# Altium PCB 手动分控1.3F.PcbDoc
Units mil, origin at the board's own origin, x right, y up, seen from the top; angles counter-clockwise.
Board outline 3805.66 x 3362.13 mil, 2 copper layers (Top Layer, Bottom Layer); 104 components, 86 nets, 354 pads, 92 vias.
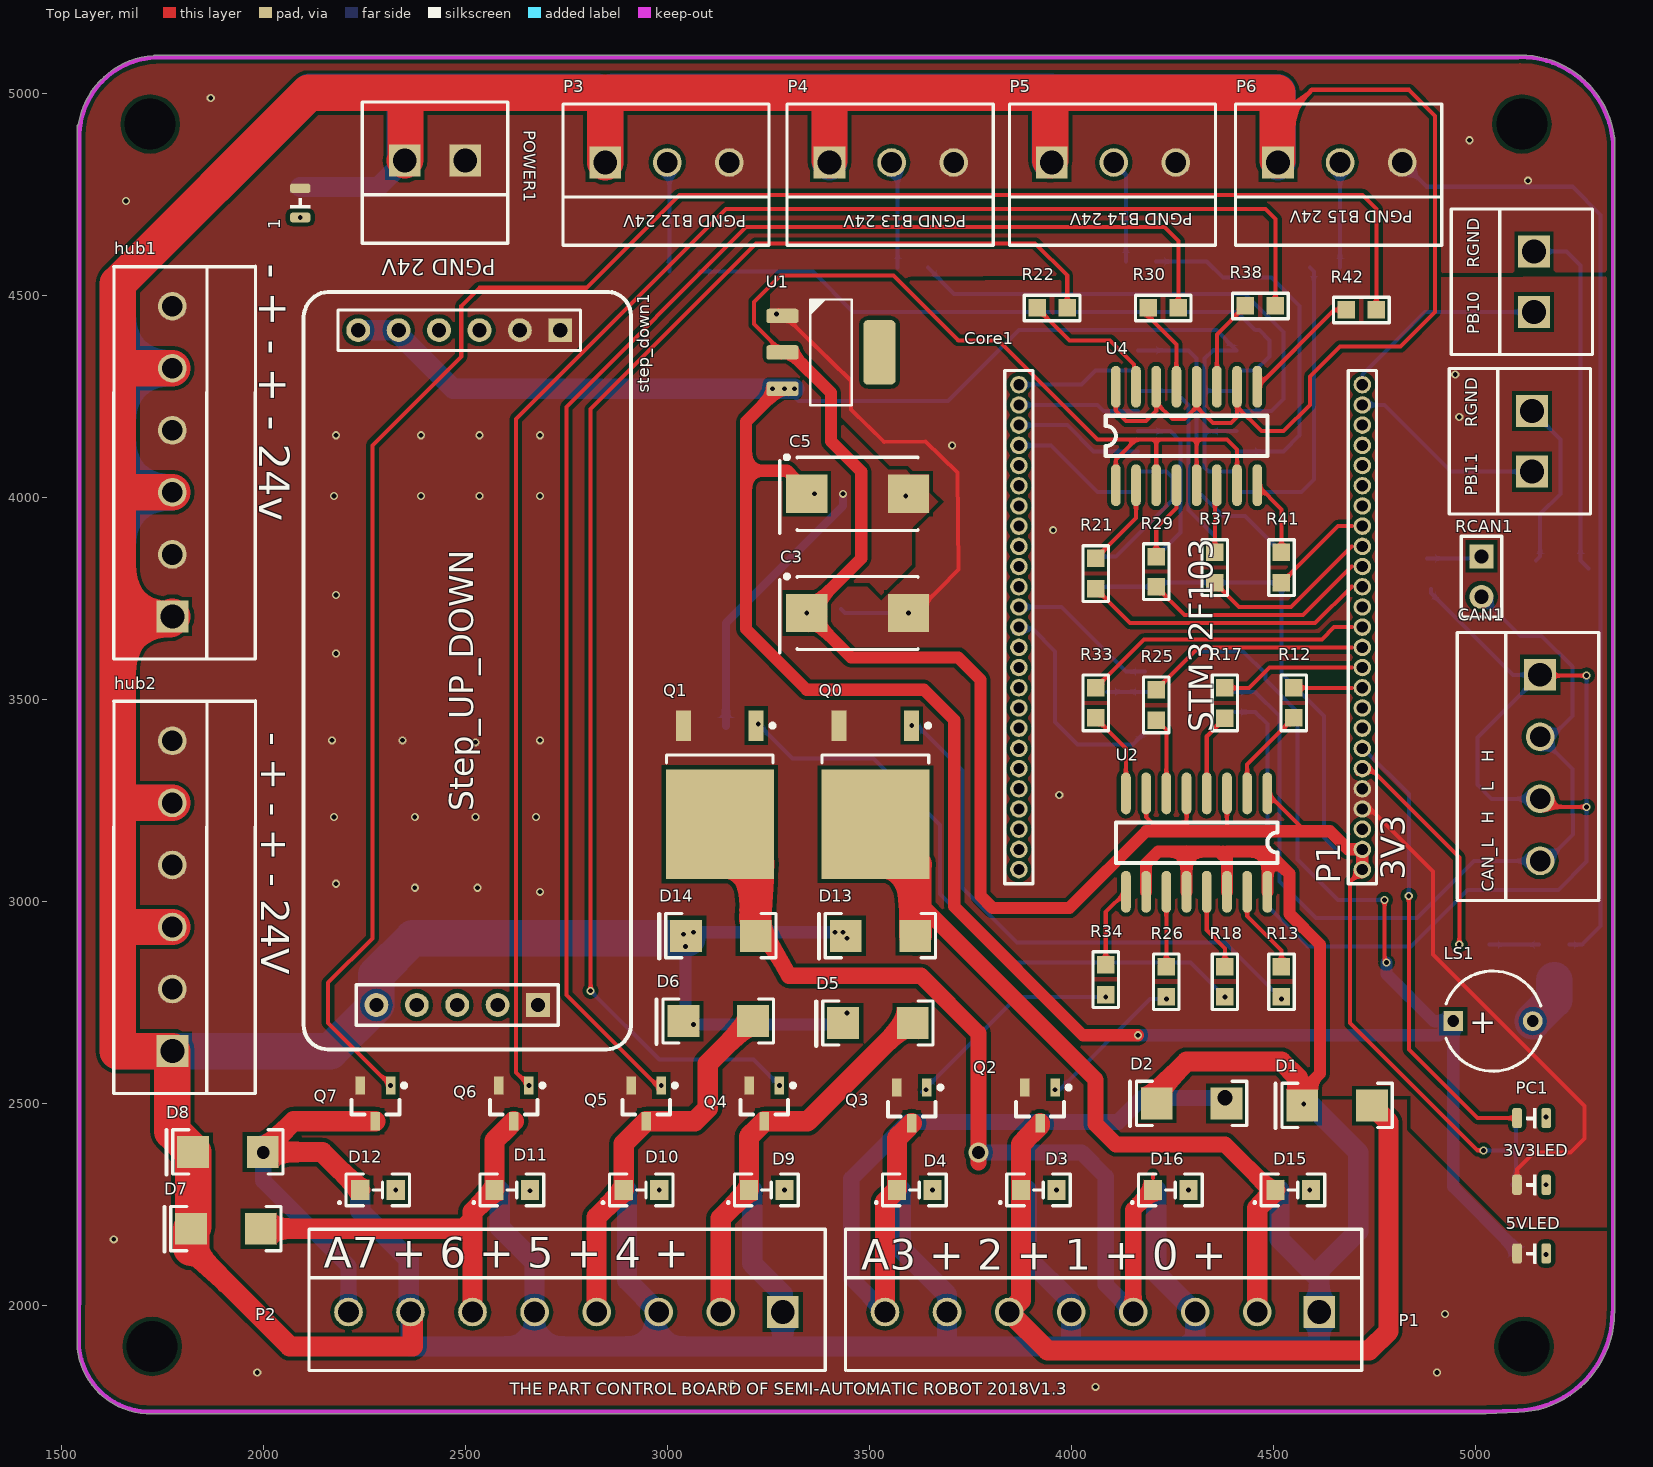
[diagram p0: Top Layer view]
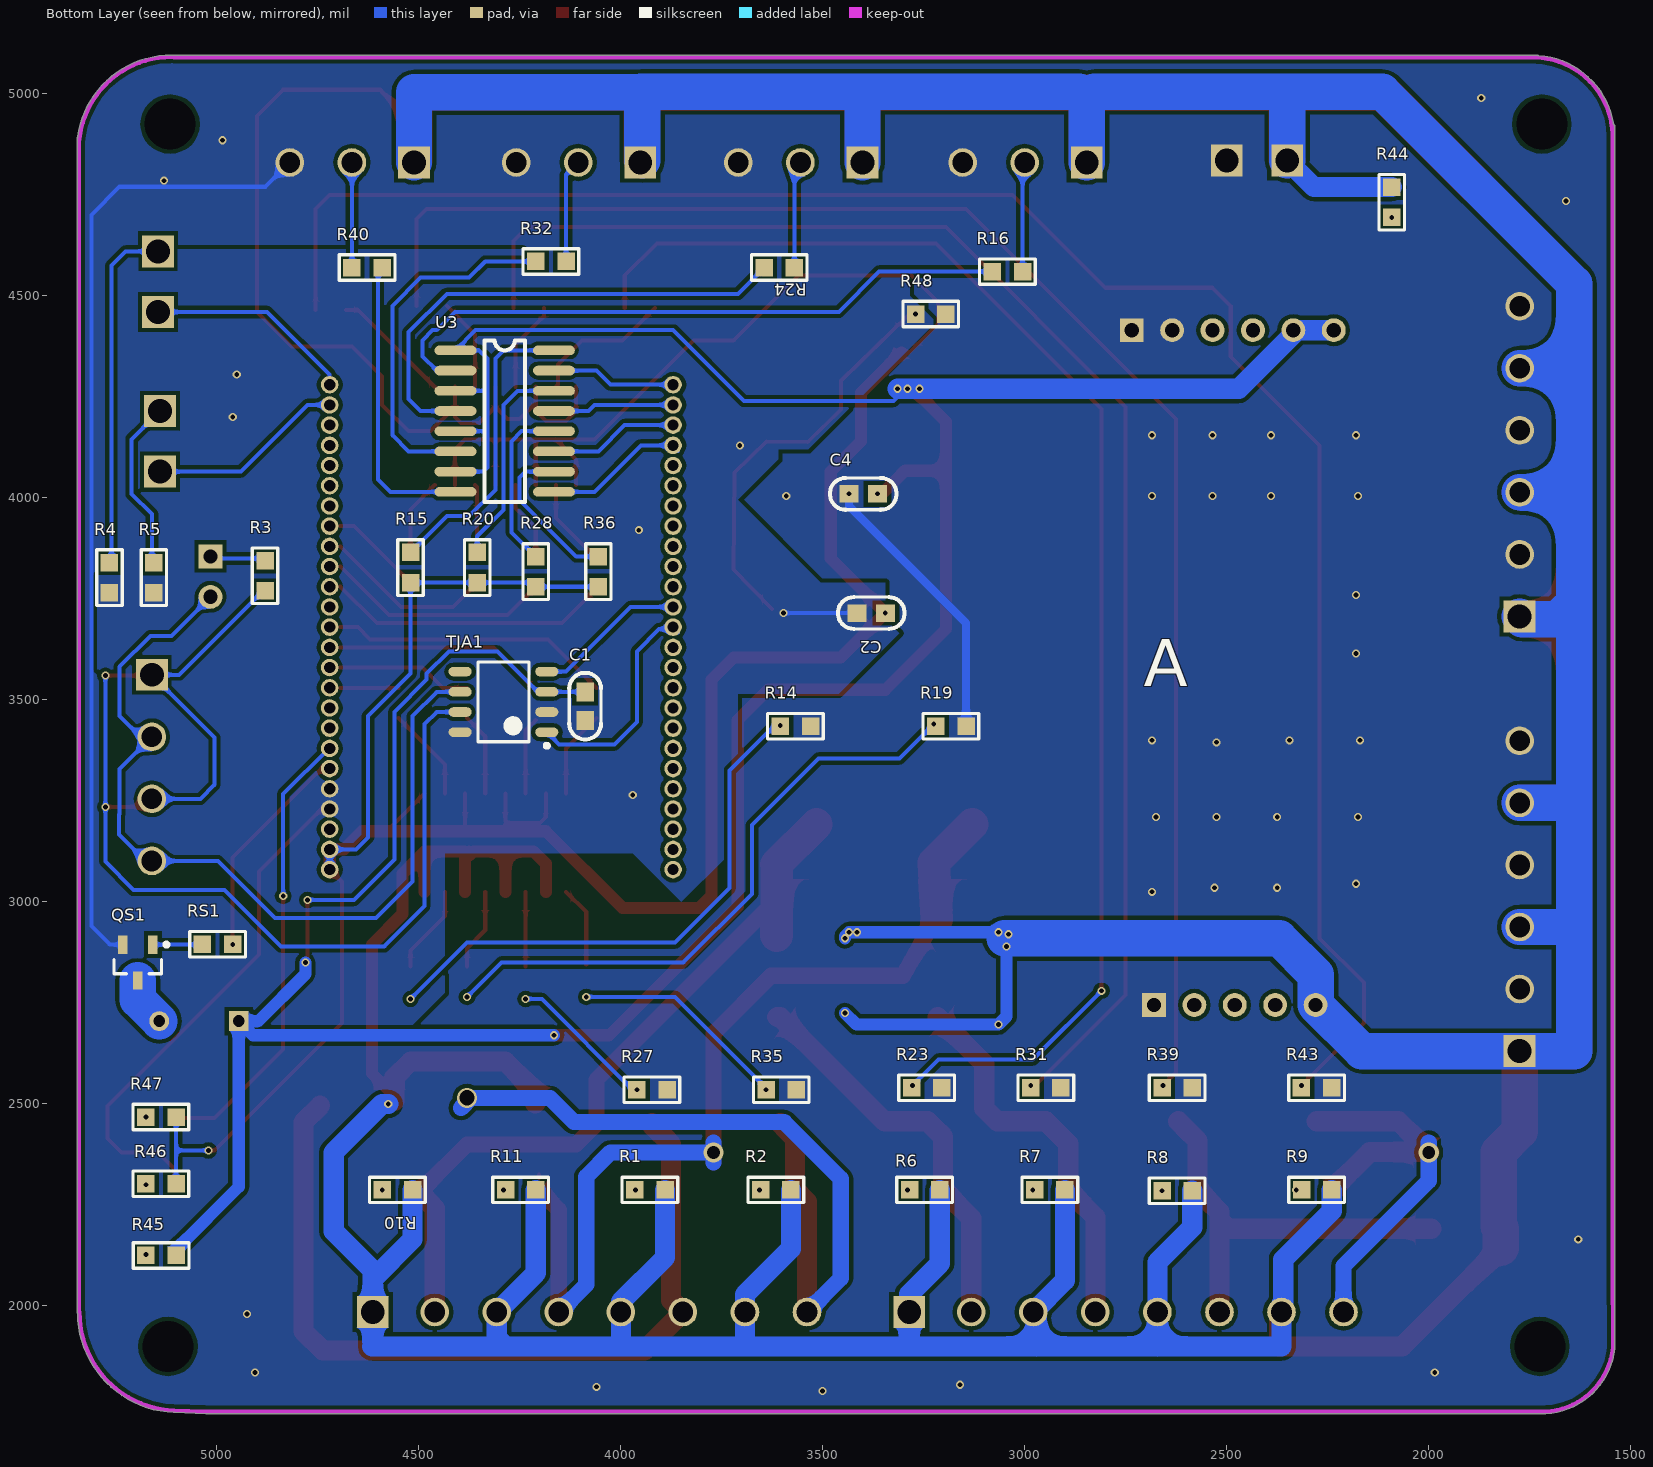
[diagram p1: Bottom Layer view, seen from below]

## Layer stack, top to bottom
Top Solder: solder mask 0.4, Solder Resist, Dk 3.5
Top Layer: signal copper 1.4
Dielectric1: dielectric 12.6, FR-4, Dk 4.8
Bottom Layer: signal copper 1.4
Bottom Solder: solder mask 0.4, Solder Resist, Dk 3.5

## Board outline
1539.39,1894.92 cw(c1544.37,1895.48) 1539.36,1895.48 1539.36,2000.86 cw(c1544.37,2000.86) 1540.19,2003.63 cw(c1544.92,2005.32) 1539.9,2005.32 1539.9,4887.53 cw(c1742.5,4892.5) 1539.9,4897.47 1539.9,4920 cw(c1544.92,4920) 1542.35,4924.3 cw(c1742.5,4892.5) 1728.11,5094.65 cw(c1730,5090) 1730,5095.02 5094.81,5095.02 cw(c5112.5,4862.5) 5343.62,4893.47 cw(c5340,4890) 5345.02,4890 5345.02,1984.66 cw(c5340,1984.66) 5344.11,1981.78 cw(c5095.78,1984.66) 5105.13,1736.49 cw(c5104.94,1741.5) 5105.13,1736.49 5027.19,1733.55 5027.17,1733.55 5027.19,1733.55 cw(c5026.98,1738.56) 5026.98,1733.55 1710.2,1733.55 cw(c1710.2,1738.56) 1709.92,1733.56 cw(c1720,1915)

## Design rules (kind name [scope] priority, off if disabled: settings)
Clearance [All] p1: gap=10 ignorepadtopadclearanceinfootprint=FALSE except(0: Arc-Hole Track-Hole SMDPad-Hole THPad-THPad THPad-Hole Via-Hole Fill-Hole Poly-Hole Region-Hole Text-Hole)
HoleSize [All] p1 off: absolutevalues=TRUE maxlimit=100 minlimit=1 maxpercent=80.000 minpercent=20.000
HoleToHoleClearance [All] p1 off: gap=10 allowstackedmicrovias=TRUE
LayerPairs [All] p1 off: enforce=TRUE
MinimumSolderMaskSliver [All] p1 off: minsoldermaskwidth=10
NetAntennae [All] p1 off: netantennaetolerance=0
PlaneConnect [All] p1: planeconnectstyle=Direct reliefexpansion=20 reliefentries=4 reliefconductorwidth=10 reliefairgap=10
PolygonConnect [All] p1: connectstyle=Direct reliefconductorwidth=10 reliefentries=4 polygonreliefangle="90 Angle" airgapwidth=10
RoutingVias [All] p1: holewidth=12 width=20 viastyle="Through Hole" minholewidth=10 minwidth=20 maxholewidth=28 maxwidth=50
SilkToSilkClearance [All] p1 off: silktosilkclearance=10
SilkToSolderMaskClearance [IsPad] p1 off: minsilkscreentomaskgap=10 clearancetoexposedcopper=TRUE
SolderMaskExpansion [All] p1: expansion=4
Width [All] p1: maxlimit=100 minlimit=10 preferedwidth=10 minimp=50.000000 maximp=50.000000 favimp=50.000000
22 further rules are at their usual default settings.

## Components (designator, comment, footprint, x,y, rotation, side; value= is the part's Value field where it differs from the comment)
1 "LED_0603" LED_0805_GREEN 2091.5,4730 r90 top
3V3LED "LED_0603" LED_0805_GREEN 5139,2300 r180 top (schematic designator 3)
5VLED "LED_0603" LED_0805_GREEN 5139,2130 r180 top (schematic designator 2)
C1 "Cap" CAP-MLCC-0603 4087.72,3520 r270 bottom value=0.1uF
C2 "Cap" CAP-MLCC-0603 3415,3715 r180 bottom value=0.1uF
C3 "Cap_Tan_0805" CAP-TAN-7343/CAPD 3345,3715 r0 top value=100uF
C4 "Cap" CAP-MLCC-0603 3435,4010 r180 bottom value=0.1uF
C5 "Cap_Tan_0805" CAP-TAN-7343/CAPD 3345,4010 r0 top value=100uF
CAN1 "Header 4" Green_4P 5255,3487.09 r270 top
Core1 "STM32F103 SMALL" STM32F103Small 4320,3665 r90 top
D1 "ss34" ss34 4660,2500 r0 top value=1N****
D2 "ss34" ss34 4300,2505 r0 top value=1N****
D3 "(BLUE)" LED-0805 3875.2,2287.24 r0 top value=(Red)
D4 "(BLUE)" LED-0805 3568.2,2287.24 r0 top value=(Red)
D5 "ss34" ss34 3523.6,2704 r0 top value=1N****
D6 "ss34" ss34 3128.6,2709 r0 top value=1N****
D7 "ss34" ss34 1910,2195 r0 top value=1N****
D8 "ss34" ss34 1915,2385 r0 top value=1N****
D9 "(BLUE)" LED-0805 3202,2287.24 r0 top value=(Red)
D10 "(BLUE)" LED-0805 2892,2287.24 r0 top value=(Red)
D11 "(BLUE)" LED-0805 2572,2287.24 r0 top value=(Red)
D12 "(BLUE)" LED-0805 2240,2287.24 r0 top value=(Red)
D13 "ss34" ss34 3530,2920 r0 top value=1N****
D14 "ss34" ss34 3135,2920 r0 top value=1N****
D15 "(BLUE)" LED-0805 4505,2287.24 r0 top value=(Red)
D16 "(BLUE)" LED-0805 4201.8,2287.24 r0 top value=(Red)
hub1 "Header 6" Green_6P 1680,3781.46 r90 top
hub2 "Header 6" Green_6P 1680,2705.83 r90 top
LS1 "Bell" CAP-ELE-PIN200/DIA250 5043.43,2705 r0 top
P1 "Header 8" Green_8P 4538.54,1890 r180 top
P2 "Header 8" Green_8P 3210.63,1890 r180 top
P3 "HDR1x3_2.54" Green_3P 2921.46,4925 r0 top
P4 "HDR1x3_2.54" Green_3P 3476.46,4925 r0 top
P5 "HDR1x3_2.54" Green_3P 4026.46,4925 r0 top
P6 "HDR1x3_2.54" Green_3P 4586.46,4925 r0 top
PB10 "HDR1x2_2.54" Green_2P 5240,4535 r270 top (schematic designator P7)
PB11 "HDR1x2_2.54" Green_2P 5235,4140 r270 top (schematic designator P8)
PC1 "LED_0603" LED_0805_GREEN 5139,2465 r180 top
POWER1 "Header 2" Green_2P 2425,4930 r0 top
Q0 "MOSFET N" LR7843 3515,3265 r270 top
Q1 "MOSFET N" LR7843 3130,3265 r270 top
Q2 "MOSFET N" NMOS_SOT23 3922.4,2496.54 r270 top
Q3 "MOSFET N" NMOS_SOT23 3605,2496.54 r270 top
Q4 "MOSFET N" NMOS_SOT23 3240,2501.54 r270 top
Q5 "MOSFET N" NMOS_SOT23 2947.6,2501.54 r270 top
Q6 "MOSFET N" NMOS_SOT23 2620,2501.54 r270 top
Q7 "MOSFET N" NMOS_SOT23 2277.6,2501.54 r270 top
QS1 "8050" SOT-23B_N 5195,2850 r270 bottom
R1 "22.1kΩ" RES-0603 3964.8,2287.31 r180 bottom value=*kΩ
R2 "22.1kΩ" RES-0603 3578.39,2287.31 r0 bottom value=*kΩ
R3 "Res_0603" RES-0603 4880,3844.8 r270 bottom value=120
R4 "1kΩ" RES-0603 5265,3765.2 r90 bottom value=*kΩ
R5 "1kΩ" RES-0603 5155,3765.2 r90 bottom value=*kΩ
R6 "22.1kΩ" RES-0603 3285,2287.31 r180 bottom value=*kΩ
R7 "22.1kΩ" RES-0603 2900.2,2287.31 r0 bottom value=*kΩ
R8 "22.1kΩ" RES-0603 2660,2285 r180 bottom value=*kΩ
R9 "22.1kΩ" RES-0603 2240,2287.31 r0 bottom value=*kΩ
R10 "22.1kΩ" RES-0603 4589.8,2287.31 r180 bottom value=*kΩ
R11 "22.1kΩ" RES-0603 4210,2287.31 r0 bottom value=*kΩ
R12 "RES" RES-0603 4550,3530 r270 top value=330Ω
R13 "1kΩ" RES-0603 4520,2840 r270 top value=*kΩ
R14 "1kΩ" RES-0603 3530,3435 r0 bottom value=*kΩ
R15 "RES" RES-0603 4520,3865 r270 bottom value=1kΩ
R16 "RES" RES-0603 3005.2,4560 r0 bottom value=1kΩ
R17 "RES" RES-0603 4380,3529.8 r270 top value=330Ω
R18 "1kΩ" RES-0603 4380,2840 r270 top value=*kΩ
R19 "1kΩ" RES-0603 3145,3435 r0 bottom value=*kΩ
R20 "RES" RES-0603 4355,3865 r270 bottom value=1kΩ
R21 "RES" RES-0603 4060,3775.2 r90 top value=330Ω
R22 "2kΩ" RES-0603 3915,4470 r0 top value=*kΩ
R23 "1kΩ" RES-0603 3205.2,2540 r0 bottom value=*kΩ
R24 "RES" RES-0603 3570,4570 r0 bottom value=1kΩ
R25 "330Ω" RES-0603 4210,3525 r270 top value=*kΩ
R26 "2kΩ" RES-0603 4235,2840 r270 top value=*kΩ
R27 "1kΩ" RES-0603 3885,2535 r0 bottom value=*kΩ
R28 "RES" RES-0603 4210,3854.8 r270 bottom value=1kΩ
R29 "RES" RES-0603 4210,3780 r90 top value=330Ω
R30 "2kΩ" RES-0603 4190,4470 r0 top value=*kΩ
R31 "1kΩ" RES-0603 2910.2,2540 r0 bottom value=*kΩ
R32 "1kΩ" RES-0603 4135,4585 r0 bottom value=*kΩ
R33 "330Ω" RES-0603 4060,3530 r270 top value=*kΩ
R34 "2kΩ" RES-0603 4085,2845 r270 top value=*kΩ
R35 "1kΩ" RES-0603 3565,2535 r0 bottom value=*kΩ
R36 "RES" RES-0603 4055,3854.8 r270 bottom value=1kΩ
R37 "330Ω" RES-0603 4355,3790 r90 top value=*kΩ
R38 "2kΩ" RES-0603 4430.2,4475 r0 top value=*kΩ
R39 "1kΩ" RES-0603 2585.2,2540 r0 bottom value=*kΩ
R40 "1kΩ" RES-0603 4664.8,4570 r180 bottom value=*kΩ
R41 "330Ω" RES-0603 4520,3790 r90 top value=*kΩ
R42 "2kΩ" RES-0603 4680.2,4465 r0 top value=*kΩ
R43 "1kΩ" RES-0603 2240.2,2540 r0 bottom value=*kΩ
R44 "Res_0603" RES-0603 2091.5,4694.2 r90 bottom value=10K
R45 "Res_0603" RES-0603 5174.8,2125 r180 bottom value=10K
R46 "Res_0603" RES-0603 5175,2302.69 r180 bottom value=10K
R47 "Res_0603" RES-0603 5175,2467.69 r180 bottom value=10K
R48 "Res1" RES-0603 3270,4455 r180 bottom value=0R
RCAN1 "" HDR1X2 5015,3855 r270 top
RS1 "Res1" RES-0603 5034.8,2895 r180 bottom value=1K
step_down1 "Step_DOWN" Step_Up_Down 2490,3550 r90 top
TJA1 "TJA1050" TJA1050 4290,3495 r0 bottom
U1 "AMS1117" SOT223-3 3405,4360 r270 top
U2 "TLP281-4" SOP16 4485,3256.81 r270 top
U3 "TLP281-4" SOP16 4396.81,4365 r180 bottom
U4 "TLP281-4" SOP16 4110,4043.19 r90 top

## Footprints (in the part's own frame and the unit in brackets; to place one, negate y for a bottom-side part, rotate by r counter-clockwise, add the part's x,y. Pads: shape width x height; smd on the part's side, far side on the other; paste and mask are expansions set on the pad)
CAP-ELE-PIN200/DIA250 [mm] "Capacitor, Electrolytic, Radial; Body 6.3 x 5 mm (Dia.xH typ); Pin Spacing 5 mm (typ)"
  rect 1.25x1.25 hole 0.75: 1(-2.5,0)
  round 1.25 hole 0.75: 2(2.5,0)
  silkscreen extent -2.96,-3.15 3,3.15
CAP-MLCC-0603 [mm]
  rect 1.2x1.1 smd: 1(0,0) 2(1.8,0)
  silkscreen extent -1.2,-1 3,1, body extent 0.02,-0.48 1.78,0.47, height 0.85
CAP-TAN-7343/CAPD [mm]
  rect 2.6x2.4 smd: 1(0,0) 2(6.4,0)
  silkscreen extent -1.7,-2.5 7,2.42
Green_2P [mm]
  rect 2x2 hole 1.5: 1(-1.905,-2.413) 2(1.905,-2.413)
  silkscreen extent -4.57,-7.62 4.57,1.27
Green_3P [mm]
  rect 2x2 hole 1.5: 1(-1.905,-2.413)
  round 1.8 hole 1.3: 2(1.995,-2.413) 3(5.895,-2.413)
  silkscreen extent -4.57,-7.62 8.38,1.27
Green_4P [mm]
  rect 2x2 hole 1.5: 1(-1.905,-2.413)
  round 1.8 hole 1.3: 2(1.995,-2.413) 3(5.895,-2.413) 4(9.795,-2.413)
  silkscreen extent -4.57,-7.62 12.28,1.27
Green_6P [mm]
  rect 2x2 hole 1.5: 1(-1.905,-2.413)
  round 1.8 hole 1.3: 2(1.995,-2.413) 3(5.895,-2.413) 4(9.795,-2.413) 5(13.695,-2.413) 6(17.595,-2.413)
  silkscreen extent -4.57,-7.63 20.12,1.27
Green_8P [mm]
  rect 2x2 hole 1.5: 1(-1.905,-2.413)
  round 1.8 hole 1.3: 2(1.995,-2.413) 3(5.895,-2.413) 4(9.795,-2.413) 5(13.695,-2.413) 6(17.595,-2.413) 7(21.495,-2.413) 8(25.395,-2.413)
  silkscreen extent -4.57,-7.62 27.88,1.27
HDR1X2 [mm] "Connector; Header; 2 Position"
  rect 1.5x1.5 hole 0.9: 1(0,0)
  round 1.5 hole 0.9: 2(2.54,0)
  silkscreen extent -1.27,-1.27 3.81,1.27
LED-0805 [mil]
  rect 45x50 smd: 1(88,0) 2(0,0)
  silkscreen extent -52,-39 122,39
LED_0805_GREEN [mil]
  rrect50% 24x50 smd: 1(-36,0) 2(36,0)
  silkscreen extent -12,-24 12,24, body extent -40,-25 40,25, height 43
LR7843 [mm] "D-PAK, 3-Pads, Body 6.20x6.72mm (max), IPC Medium Density"
  rect 6.9x6.8 smd: D(1.85,0)
  rect 1.9x0.95 smd: G(-4.35,2.28) S(-4.35,-2.28)
  silkscreen extent -4.47,-3.35 -2,3.43, body extent -2.5,-3.35 3.7,3.35, height 2.38
NMOS_SOT23 [mm]
  rect 1.15x0.6 smd: D(1.125,0) G(-1.125,0.95) S(-1.125,-0.95)
  silkscreen extent -1.25,-1.5 0.7,1.93, body extent -0.7,-1.5 0.7,1.5, height 1.14
RES-0603 [mm]
  rect 1.1x1.1 smd: 1(0,0) 2(1.9,0)
  silkscreen extent -0.8,-0.8 2.7,0.8, body extent 0.1,-0.48 1.8,0.47, height 0.6
SOP16 [mil]
  oval 103.62x24 smd: 1(-11.81,0) 2(-11.81,-50) 3(-11.81,-100) 4(-11.81,-150) 5(-11.81,-200) 6(-11.81,-250) 7(-11.81,-300) 8(-11.81,-350) 9(231.81,-350) 10(231.81,-300) 11(231.81,-250) 12(231.81,-200) 13(231.81,-150) 14(231.81,-100) 15(231.81,-50) 16(231.81,0)
  silkscreen extent 60,-375 160,25
SOT223-3 [mil]
  rrect40% 36x80 smd: 1(-90.16,-120) 2(0,-120) 3(90.16,-120)
  rrect30% 160x80 smd: 4(0,120)
  silkscreen extent -131,-51 131,51, body extent -132,-144 132,144, height 71
SOT-23B_N [mm] "SOT23, 3-Leads, Body 2.9x1.3mm, Pitch 0.95mm, Lead Span 2.4mm, IPC Medium Density"
  rect 1.15x0.6 smd: 1(-1.125,0.95) 2(-1.125,-0.95) 3(1.125,0)
  silkscreen extent -1.25,-1.5 0.7,1.92, body extent -0.7,-1.5 0.7,1.5, height 1.14
ss34 [mm]
  rect 2x2 smd: A(2.125,-0.102) K(-2.25,-0.102)
  silkscreen extent -3.94,-1.52 3.4,1.3, body extent -2.48,-1.48 2.37,1.3, height 1.4
Step_Up_Down [mm]
  rect 1.5x1.5 hole 0.9: 1(-20.447,-4.826) 6(21.971,-6.223)
  round 1.5 hole 0.9: 2(-20.447,-2.286) 3(-20.447,0.254) 4(-20.447,2.794) 5(-20.447,5.334) 7(21.971,-3.683) 8(21.971,-1.143) 9(21.971,1.397) 10(21.971,3.937) 11(21.971,6.477)
  silkscreen extent -23.24,-10.67 24.38,9.91
STM32F103Small [mm]
  round 1.1 hole 0.7: 1(-14.859,-10.16) 2(-13.589,-10.16) 3(-12.319,-10.16) 4(-11.049,-10.16) 5(-9.779,-10.16) 6(-8.509,-10.16) 7(-7.239,-10.16) 8(-5.969,-10.16) 9(-4.699,-10.16) 10(-3.429,-10.16) 11(-2.159,-10.16) 12(-0.889,-10.16) 13(0.381,-10.16) 14(1.651,-10.16) 15(2.921,-10.16) 16(4.191,-10.16) 17(5.461,-10.16) 18(6.731,-10.16) 19(8.001,-10.16) 20(9.271,-10.16) 21(10.541,-10.16) 22(11.811,-10.16) 23(13.081,-10.16) 24(14.351,-10.16) 25(15.621,-10.16) 26(-14.859,11.43) 27(-13.589,11.43) 28(-12.319,11.43) 29(-11.049,11.43) 30(-9.779,11.43) 31(-8.509,11.43) 32(-7.239,11.43) 33(-5.969,11.43) 34(-4.699,11.43) 35(-3.429,11.43) 36(-2.159,11.43) 37(-0.889,11.43) 38(0.381,11.43) 39(1.651,11.43) 40(2.921,11.43) 41(4.191,11.43) 42(5.461,11.43) 43(6.731,11.43) 44(8.001,11.43) 45(9.271,11.43) 46(10.541,11.43) 47(11.811,11.43) 48(13.081,11.43) 49(14.351,11.43) 50(15.621,11.43)
  silkscreen extent -15.75,-11.05 16.51,12.32
TJA1050 [mm] "SOIC, 8-Leads, Body 4.90x3.90mm, Pitch 1.27mm, IPC Medium Density"
  oval 1.45x0.6 smd: 1(-2.725,1.905) 2(-2.725,0.635) 3(-2.725,-0.635) 4(-2.725,-1.905) 5(2.725,-1.905) 6(2.725,-0.635) 7(2.725,0.635) 8(2.725,1.905)
  silkscreen extent -2.85,-2.5 1.6,2.88, body extent -2,-2.5 2,2.5, height 1.75

## Part data
1 3V3LED 5VLED PC1: "LED"
C1 C2 C3 C4 C5: "Capacitor"
  C1 C2 C4: LatestRevisionDate=17-Jul-2002, LatestRevisionNote="Re-released for DXP Platform.", PackageReference=RAD-0.3, Published=8-Jun-2000, Publisher="Altium Limited"
CAN1: "Header, 4-Pin", LatestRevisionDate=17-Jul-2002, LatestRevisionNote="Re-released for DXP Platform.", Publisher="Altium Limited"
D1 D2 D5 D6 D7 D8 D13 D14: library part DIODE-Schottky, "肖特基二极管", Code_JEDEC=DO-214-AA, LatestRevisionDate=17-Jul-2002, LatestRevisionNote="Re-released for DXP Platform.", PackageDescription="DO-214-AA/SMB; 2 C-Bend Leads; Body 5.3 x 3.6 mm, inc. leads (LxW)", PackageReference=SMB, Published=8-Jun-2000, Publisher="Altium Limited"
D3 D4 D9 D10 D11 D12 D15 D16: library part LED, "LED", LatestRevisionDate=08-Jul-2005, LatestRevisionNote="Mech Layer 1 removed.", PackageDescription="LED; 2 Leads", PackageReference=LED-1, Published=8-Jun-2000, Publisher="Altium Limited"
hub1 hub2: "Header, 6-Pin", LatestRevisionDate=17-Jul-2002, LatestRevisionNote="Re-released for DXP Platform.", Publisher="Altium Limited"
LS1: "Electrical Bell", LatestRevisionDate=17-Jul-2002, LatestRevisionNote="Re-released for DXP Platform.", PackageReference=PIN2, Published=24-Mar-1999, Publisher="Altium Limited"
P1 P2: "Header, 8-Pin", LatestRevisionDate=17-Jul-2002, LatestRevisionNote="Re-released for DXP Platform.", Publisher="Altium Limited"
P3 P4 P5 P6 PB10 PB11: "Header"
POWER1: "Header, 2-Pin", LatestRevisionDate=17-Jul-2002, LatestRevisionNote="Re-released for DXP Platform.", Publisher="Altium Limited"
Q0 Q1 Q2 Q3 Q4 Q5 Q6 Q7: "IRF530"
QS1: library part QNPN, "NPN Bipolar Transistor", LatestRevisionDate=29-May-2009, LatestRevisionNote="IPC-7351 Footprint Added.", PackageDescription="3-Pin SOT-23 Package 0.95 mm Pitch, 2.4 mm Lead Span", PackageReference=SOT-23B, PackageVersion=Aug-1999, Published=8-Jun-2000, Publisher="Altium Limited"
R1 R2 R4 R5 R6 R7 R8 R9 R10 R11 R13 R14 R18 R19 R22 R23 R25 R26 R27 R30 R31 R32 R33 R34 R35 R37 R38 R39 R40 R41 R42 R43: library part RES, "电阻", LatestRevisionDate=17-Jul-2002, LatestRevisionNote="Re-released for DXP Platform.", PackageDescription="Axial Device, Thru-Hole; 2 Leads; 0.3 in Pin Spacing", PackageReference=AXIAL-0.3, Published=8-Jun-2000, Publisher="Altium Limited"
R3 R44 R45 R46 R47 R48 RS1: "Resistor"
  R48 RS1: LatestRevisionDate=17-Jul-2002, LatestRevisionNote="Re-released for DXP Platform.", PackageReference=AXIAL-0.3, Published=8-Jun-2000, Publisher="Altium Limited"
R12 R15 R16 R17 R20 R21 R24 R28 R29 R36: "电阻", LatestRevisionDate=17-Jul-2002, LatestRevisionNote="Re-released for DXP Platform.", PackageDescription="Axial Device, Thru-Hole; 2 Leads; 0.3 in Pin Spacing", PackageReference=AXIAL-0.3, Published=8-Jun-2000, Publisher="Altium Limited"
RCAN1: library part "Header 2", "Header, 2-Pin", LatestRevisionDate=17-Jul-2002, LatestRevisionNote="Re-released for DXP Platform.", Publisher="Altium Limited"
TJA1: "CAN总线收发器"
U1: library part AMS１１１７
U2 U3 U4: library part IC-TLP521-4, "TLP521-4,TLP281-4"

## Free pads (board coordinates)
  round 0 hole 125.98: 34(1720,4925) 35(5115,4925) 36(5120,1900) 37(1725,1900)

## Via types
v1: diameter 20, hole 12, Top Layer to Bottom Layer, 89 vias
v2: diameter 50, hole 32, Top Layer to Bottom Layer, 2 vias
v3: diameter 50, hole 38, Top Layer to Bottom Layer, 1 vias

## Nets (pads, with @x,y where several pads share a name; then routed paths per layer and width w, separated by ;. In a path a pad name is that pad's centre, name@x,y a point inside that pad or via, vN(x,y) a via of type N, cw(c..) or ccw(c..) an arc to the next point about the centre after c; other vN are vias at no path point)
3V3: C2.2 C3.1 Core1.1 Core1.2 R15.2 R20.2 R28.2 R36.2 R46.2 R47.2 U1.2 U2.1 U2.3 U2.5 U2.7 U4.1 U4.3 U4.5 U4.7 | length 7829.9
  Top Layer w10: U1.2@3305,4360 U1.2 3215,4430 3215,4485 3280,4550 3560,4550 3720,4390 3820,4390 4065,4145 4160,4145 ; U4.1 4110,4095 4160,4145 ; U2.7 4185,3210 4200,3195 4280,3195 ; U4.3 4210,4145 ; U2.5 4285,3200 4280,3195 ; 4295,3180 4280,3195 ; U4.5 4310,4145 ; U2.3 4385,3190 4395,3180 ; U4.7 4410,4120 4385,4145 4310,4145 ; U2.1 4573.62,3180 ; Core1.2@4705,3130 Core1.2 ; Core1.1 4690,3050 4690,2700 5005,2385 v1@5015,2385 ; 4160,4145 4210,4145 ; 4210,4145 4310,4145
  Top Layer w30: U1.2@3305,4360 3405,4260 3405,4140 3480,4065 3480,3850 v1(3345,3715) 3455,3605 3720,3605 3775,3550 3775,3015 3805,2985 3995,2985 4185,3175 4640,3175 4685,3130 Core1.2@4705,3130 ; Core1.1 Core1.2
  Bottom Layer w10: R36.2 R28.2 4220.2,3790.2 R20.2 R15.2 4520,3565 4625,3460 4625,3160 4655,3130 Core1.2 Core1.1 ; v1(5020,2385) 5100.2,2385 ; R46.2@5090,2300 R46.2@5103,2300 ; R46.2@5092.31,2297.69 R46.2@5105.2,2297.69 ; R46.2 5100.2,2385 ; R47.2 5100.2,2385
5V: C1.1 C4.2 C5.1 LS1.1 R45.2 step_down1.10 step_down1.11 TJA1.3 U1.3 U3.1 U3.3 U3.5 U3.7 | length 8444.1
  Top Layer w10: v1(4775,3005) 4775,2855 v1(4780,2850)
  Top Layer w30: U1.3@3268.04,4261.96 3195,4188.91 3195,4067.11 ; C5.1@3353.03,4010 3295.92,4067.11 3195,4067.11 ; v1(4165,2670) 4028.43,2670 3710,2988.43 3710,3450 3635,3525 3345,3525 3195,3675 3195,4067.11
  Bottom Layer w10: 3300,4265 3325,4240 3695,4240 3870,4415 4358.62,4415 U3.1 4350,4365 4330,4345 4330,4265 ; C1.1 TJA1.3 4205,3520 4305,3620 4425,3620 4480,3565 4480,3550 4560,3470 4560,3105 4660,3005 v1@4770,3005 ; U3.7 4340,4065 4330,4075 4330,4165 ; U3.5 4345,4165 4330,4165 ; U3.3 4330,4265 ; 4330,4165 4330,4265
  Bottom Layer w30: step_down1.10@2335,4405 step_down1.10 ; v1(4165,2670) 4910,2670 LS1.1 ; v1(4780,2850) 4780,2821.57 4896.57,2705 LS1.1 ; R45.2@5095,2135 R45.2@5095,2145 ; R45.2@5100,2140 R45.2@5095,2145 ; LS1.1 4945,2295 R45.2@5095,2145
  Bottom Layer w50: step_down1.11 step_down1.10 ; step_down1.10@2335,4405 2470,4270 v1(3260,4270) v1(3290,4270) v1(3315,4270)
  other v1: 3364.13,4010
24V: D1.K D2.K D5.K D6.K D7.K D8.K D13.K D14.K hub1.1 hub1.3 hub1.5 hub2.1 hub2.3 hub2.5 P1.1 P1.3 P1.5 P1.7 P2.1 P2.3 P2.5 P2.7 P3.1 P4.1 P5.1 P6.1 POWER1.1 R1.2 R2.1 R6.2 R7.1 R8.2 R9.1 R10.2 R11.1 R44.2 step_down1.5 U2.10 U2.12 U2.14 U2.16 U4.10 U4.12 U4.14 U4.16 | length 27560.6
  Top Layer w10: U4.16 4110,4215 4135,4190 4185,4190 4210,4215 U4.14@4210,4235 ; U4.14 U4.14@4210,4235 ; U4.12 U4.12@4310,4225 ; U4.10 U4.10@4410,4225 ; 4510,4925 4595,5010 4835,5010 4900,4945 4900,4460 4815,4375 4665,4375 4590,4300 4590,4230 4525,4165 4470,4165 U4.10@4410,4225 ; U4.14@4210,4235 4250,4195 4280,4195 U4.12@4310,4225 ; U4.12@4310,4225 4350,4185 4395,4185 4410,4200 U4.10@4410,4225
  Top Layer w30: U2.10 4185,3095 4215,3125 4285,3125 ; U2.12 4285,3125 ; 4375,3125 4385,3115 ; U2.14 4385,3115 ; U2.16 4485,3125 ; D1.K@4570,2530 4615,2575 4615,2895 4540,2970 4540,3070 4485,3125 ; 4285,3125 4365,3125 4375,3115 4385,3115 ; 4385,3115 4385,3125 4485,3125
  Top Layer w50: 1821.4,2143.6 2065,1900 2370,1900 2370,1979.37 P2.7 ; D2.K 4211.4,2531.4 4285,2605 4520,2605 4560,2565 D1.K@4560,2507.4
  Top Layer w90: hub2.3 1647.09,2937.91 1640,2945 ; hub2.5 1655,3245 1640,3260 ; hub1.1 1768.54,3700 1640,3700 ; hub1.3 1643.54,4013.54 1640,4010 ; hub1.5 1640.63,4320.63 1640,4320 ; 1821.4,2143.6 D7.K 1826.4,2196 D8.K 1775,2432.4 hub2.1 1640.83,2630.83 1640,2630 1640,2945 ; POWER1.1 2352.09,4837.09 2352.09,5002.91 ; P3.1 2846.46,4996.46 2840,5002.91 ; P4.1@3401.46,4835 3401.46,5002.91 ; P5.1@3947.91,4835 3947.91,5002.91 ; P6.1@4510,4835 4510,4925 4510,5002.91 3947.91,5002.91 ; 1640,2945 1640,3260 ; 1640,3260 1640,3700 ; 1640,3700 1640,4010 ; 1640,4010 1640,4320 ; 1640,4320 1640,4530 2112.91,5002.91 2352.09,5002.91 ; 2352.09,5002.91 2840,5002.91 ; 2840,5002.91 3398.54,5002.91 3400,5001.46 3401.46,5002.91 ; 3401.46,5002.91 3947.91,5002.91
  Bottom Layer w30: 3045,2910 v1(3045,2890) 3045,2716.4 v1(3065,2696.4) 3416.4,2696.4 v1(3445,2725) ; v1(3065,2925) 3070,2925 3075,2930 ; 3075,2925 v1(3415,2925) v1(3435,2925) 3445,2915 v1(3445,2910)
  Bottom Layer w50: R44.2 2284,4769 POWER1.1 ; R9.1 2240,2235 2360,2115 2360,2010 2364.37,2005.63 P2.7 2364.37,1899.53 2671.46,1899.53 ; R8.2 2585.2,2194.8 2671.46,2108.54 P2.5 2671.46,1899.53 ; R7.1 2900.2,2063.35 P2.3 2970.47,1976.92 2970.47,1899.53 ; R6.2 3210.2,2104.8 3285.63,2029.37 P2.1 3285.63,1909.7 3275.47,1899.53 ; R2.1 3578.39,2141.61 3692.28,2027.72 P1.7 3692.28,1902.28 3689.53,1899.53 ; R1.2 3890,2120 3999.37,2010.63 P1.5 3999.37,1908.44 3990.47,1899.53 ; R11.1 4210,2081.46 P1.3 4306.46,1921.46 4284.53,1899.53 ; R10.2 4515,2165 4613.54,2066.46 ; v1(4575,2500) 4590,2500 4710,2380 4710,2185 4613.54,2088.54 4613.54,2066.46 ; 2671.46,1899.53 2970.47,1899.53 ; 2970.47,1899.53 3275.47,1899.53 ; 3275.47,1899.53 3689.53,1899.53 ; 3689.53,1899.53 3990.47,1899.53 ; 3990.47,1899.53 4284.53,1899.53 ; 4284.53,1899.53 4614.53,1899.53 4613.54,1900.53 P1.1 4613.54,2066.46
  Bottom Layer w90: 1645,3245 hub2.5 ; 1645,3725 1655,3725 1680,3700 1768.54,3700 hub1.1 ; hub2.3 1647.09,2937.91 1640,2945 ; hub1.3 1640,4013.54 ; hub1.5 1640,4320.63 ; POWER1.1 2350,5000 ; P3.1 2846.46,4986.46 ; 3050,2910 3045,2910 2370,2910 2280,2820 step_down1.5 2165.83,2630.83 hub2.1 1640,2630.83 1640,2945 ; P4.1 3401.46,5000 ; P5.1@3946.46,4835 3946.46,4998.54 3947.91,5000 ; P6.1 4511.46,5003.54 3951.46,5003.54 3950,5005 2865,5005 2846.46,4986.46 ; 1640,2945 1640,4013.54 ; 1640,4013.54 1640,4320.63 ; 1640,4320.63 1640,4530 2115,5005 2827.91,5005 2846.46,4986.46
  other v1: 3040,2920
A0: Q0.G R13.2 R14.2 | length 1365.2
  Bottom Layer w10: v1(3604.76,3436.26) 3618.74,3436.26 3730,3325 3730,3035 3865,2900 4380,2900 v1(4520,2760)
A0_OUT-: D13.A D15.2 P1.2 Q0.D | length 1935.3
  Top Layer w40: 3615,3005 4060,2560 4060,2450 4110,2400 4380,2400 4492.76,2287.24 D15.2
  Top Layer w50: P1.2 4460,2242.24 D15.2
  Top Layer w80: Q0.D 3615,3092.17 3613.65,3090.81 D13.A 3615,2917.35 3615,2960
A1: Q1.G R18.2 R19.2 | length 1551.1
  Bottom Layer w10: R19.2@3219.76,3425.24 3225,3430.47 v1(3225,3440) 3310,3355 3510,3355 3675,3190 3675,3020 3845,2850 4295,2850 v1(4380,2765)
A1_OUT-: D14.A D16.2 P1.4 Q1.D | length 2374.9
  Top Layer w10: 3217.55,2957.45 3237.57,2929.61 D14.A@3238.83,2927.38 ; D16.2@4201.8,2272.37 D16.2@4201.8,2277.37 ; 4201.8,2316.8 4201.8,2325.61
  Top Layer w40: D14.A@3238.83,2927.38 3300.99,2817.1 3627.9,2817.1 3770,2675 v2(3770,2380) 3770,2355 ; P1.4 4152.91,2238.36 D16.2
  Top Layer w80: Q1.D 3225,3097.17 3217.55,2957.45
  Bottom Layer w40: 3770,2355 v2(3770,2380) ; 3770,2405 v2(3770,2380) ; P1.4 4085,2052.91 4085,2320 4025,2380 v2(3770,2380)
A2: Q2.G R26.2 R27.2 | length 371.9
  Bottom Layer w10: v1(3959.8,2535) 3970,2535 4195,2760 v1(4235,2760) v1@4237.5,2757.5
A2_OUT-: D1.A D3.2 P1.6 Q2.D | length 2072.7
  Top Layer w50: Q2.D 3922.4,2447.4 3875.2,2400.2 D3.2 3875.2,2014.37 P1.6 3940.83,1890 4737.29,1890 4785,1937.71 4785,2454.65 D1.A
A3: Q3.G R34.2 R35.2 | length 552.3
  Bottom Layer w10: R35.2@3630,2530 3865,2765 v1(4085,2765)
  other v1: 3639.8,2535
A3_OUT-: D2.A D4.2 P1.8 Q3.D | length 1893.2
  Top Layer w50: P1.8 3538.74,2257.79 D4.2 3568.2,2415.44 Q3.D
  Bottom Layer w40: P1.8 3455,2068.74 3455,2315 3595,2455 4115,2455 4175,2515 4370,2515 4395,2490 4395,2489.65 4395.18,2489.82
  other v3: 4380,2515
A4: Q4.G R22.2 R23.2 | length 3467.3
  Top Layer w10: v1(2810,2780) 2810,4220 3220,4630 3910,4630 3989.8,4550.2 R22.2
  Bottom Layer w10: v1(2810,2780) 2980,2610 3213.23,2610 v1(3277.4,2545.83)
A4_OUT-: D5.A D9.2 P2.2 Q4.D | length 996
  Top Layer w50: P2.2 3132.09,2217.33 D9.2 3202,2419.24 Q4.D 3347.24,2457.24 3605,2715 D5.A@3612.24,2715
A5: Q5.G R30.2 R31.2 | length 3661.6
  Top Layer w10: v1(2985,2545.83) 2974.17,2545.83 2750,2770 2750,4225 3195,4670 4230,4670 4264.8,4635.2 R30.2
A5_OUT-: D6.A D10.2 P2.4 Q5.D | length 961.9
  Top Layer w50: P2.4 2825,2220.24 D10.2 2892,2401.65 Q5.D 3067.76,2457.24 3100,2489.49 3100,2600 D6.A@3215,2715
A6: Q6.G R38.2 R39.2 | length 3983.3
  Top Layer w10: v1(2657.4,2545.83) 2625,2578.23 2625,4195 3145,4715 4480,4715 4505,4690 R38.2
A6_OUT-: D7.A D11.2 P2.6 Q6.D | length 1047.9
  Top Layer w50: D7.A 2496,2191 2517.91,2212.91 ; P2.6 2517.91,2212.91 ; Q6.D 2572,2409.24 D11.2 2517.91,2233.16 2517.91,2212.91
A7: Q7.G R42.2 R43.2 | length 4773.5
  Top Layer w10: v1(2315,2545.83) 2160,2700.83 2160,2800 2270,2910 2270,4130 2490,4350 2490,4475 2535,4520 2800,4520 3030,4750 4720,4750 4755,4715 R42.2
A7_OUT-: D8.A D12.2 P2.8 Q7.D | length 1093.1
  Top Layer w50: D12.2 2146.24,2381 D8.A 2074.89,2457.24 Q7.D
  Bottom Layer w40: 2000,2405 v2(2000,2380) 2000,2310 2210.83,2099.17 P2.8@2210.83,1990
B12: P3.2 R16.1 | length 272.2
  Bottom Layer w10: P3.2 3005.2,4824.8 R16.1
B13: P4.2 R24.1 | length 266.2
  Bottom Layer w10: P4.2 3570,4815 R24.1
B14: P5.2 R32.1 | length 257.4
  Bottom Layer w10: P5.2 4135,4800 R32.1
B15: P6.2 R40.1 | length 260.1
  Bottom Layer w10: R40.1 4664.8,4829.8 P6.2
CAN_H: CAN1.1 CAN1.3 R3.2 TJA1.7 | length 3032.2
  Top Layer w10: CAN1.3 5180,3235 v1(5275,3235) ; CAN1.1 5162.91,3565 5167.91,3560 v1(5275,3560)
  Bottom Layer w10: TJA1.7@4405,3470 4455,3470 4485,3440 4485,2990 4585,2890 4840,2890 4980,3030 5205,3030 5275,3100 v1(5275,3235) v1(5275,3560) ; R3.2@4890,3775 4890,3765 5092.91,3562.09 CAN1.1 5005,3407.09 5005,3290 5040,3255 CAN1.3
CAN_L: CAN1.2 CAN1.4 RCAN1.2 TJA1.6 | length 2211.8
  Bottom Layer w10: TJA1.6 4455,3520 4515,3460 4515,3050 4605,2960 4855,2960 4996.46,3101.46 CAN1.4 5176.46,3101.46 5241.46,3166.46 5241.46,3216.1 5240,3217.56 5240,3328.54 CAN1.2 5188.54,3408.54 5240,3460 5240,3582.04 5163.52,3658.52 5111.48,3658.52 RCAN1.2 RCAN1.2@5005,3765
CAN_RX: Core1.39 TJA1.4 | length 379
  Bottom Layer w10: Core1.39 3975,3730 4135,3570 TJA1.4
CAN_TX: Core1.38 TJA1.1 | length 559
  Bottom Layer w10: Core1.38@3858.35,3666.65 Core1.38@3881.65,3666.65 ; Core1.38@3880,3675 3905,3675 3960,3620 3960,3445 4015,3390 4152.72,3390 TJA1.1
GND: 3V3LED.2 C1.2 C2.1 C3.2 Core1.4 Core1.5 R4.1 R5.1 R48.1 TJA1.2 TJA1.8 U1.1 | length 2487.8
  Top Layer w10: U1.1@3275,4465.16 3277.53,4462.69 3285.1,4455.26 3287.6,4452.82 3454,4289.89 3454.75,4218.58 3536.86,4138.18 3639.27,4139.26 3717.71,4062.45 3720.24,3822.27 C3.2@3625,3725 ; Core1.4 4740,3230 4895,3075 4895,2870 5270,2495 5270,2415 5235,2380 5145,2380 5103,2338 3V3LED.2
  Bottom Layer w10: C2.1@3430,3725 3440,3715 v1(3596.97,3715)
  other v1: 3970,3265 3955,3920 3705,4130 4960,4200 4950,4305 3270,4455
Net1_1: 1.1 R44.1
  other v1: 2091.5,4694.2
Net2_1: 5VLED.1 R45.1
  other v1: 5175,2127.69
Net3_1: 3V3LED.1 R46.1
  other v1: 5175,2300
NetD3_1: D3.1 R1.1
  other v1: 3963.2,2287.24
NetD4_1: D4.1 R2.2
  other v1: 3656.2,2287.24
NetD9_1: D9.1 R6.1
  other v1: 3290,2287.24
NetD10_1: D10.1 R7.2
  other v1: 2980,2287.24
NetD11_1: D11.1 R8.1
  other v1: 2660,2285
NetD12_1: D12.1 R9.2
  other v1: 2328,2287.24
NetD15_1: D15.1 R10.1
  other v1: 4589.8,2287.31
NetD16_1: D16.1 R11.2
  other v1: 4289.8,2287.24
NetLS1_2: LS1.2 QS1.3 | length 122.7
  Bottom Layer w90: LS1.2 5195,2758.15 QS1.3
NetP7_1: PB10.1 R4.2 | length 887.8
  Bottom Layer w10: PB10.1 5225,4610 5260,4575 5260,3845 R4.2 R4.2@5280,3825
NetP8_1: PB11.1 R5.2 | length 423.8
  Bottom Layer w10: PB11.1 5210,4145 5210,4010 5160,3960 5160,3855 R5.2@5150,3845
NetPC1_1: PC1.1 R47.1
  other v1: 5175,2467.69
NetQS1_1: QS1.1 RS1.1 | length 123.1
  Bottom Layer w10: RS1.1 5035.51,2894.29 QS1.1
NetR3_1: R3.1 RCAN1.1 | length 137.1
  Bottom Layer w10: R3.1@4880,3850 4985.2,3850 4990.2,3855 RCAN1.1
NetR12_2: R12.2 U2.2 | length 234.2
  Top Layer w10: U2.2 4435,3340.2 R12.2
NetR13_1: R13.1 U2.15 | length 220.2
  Top Layer w10: U2.15 4435,2965 4520,2880 R13.1
NetR15_1: R15.1 U3.16 | length 752.5
  Bottom Layer w10: U3.16 4290,4365 4310,4345 4310,4020 4375,3955 4430,3955 R15.1
NetR16_2: R16.2 U3.2 | length 1616.3
  Bottom Layer w10: R16.2 3360,4560 3460,4460 4410,4460 4455,4415 4465,4415 4490,4390 4490,4350 4455,4315 U3.2
NetR17_2: R17.2 U2.4 | length 205
  Top Layer w10: U2.4 4335,3410 R17.2
NetR18_1: R18.1 U2.13 | length 203.6
  Top Layer w10: U2.13 4335,2930 4380,2885 R18.1
NetR20_1: R20.1 U3.14 | length 531.4
  Bottom Layer w10: U3.14 4255,4265 4290,4230 4290,3970 4355,3905 R20.1
NetR21_2: R21.2 U4.2 | length 222.8
  Top Layer w10: R21.2 4160,3950 U4.2
NetR22_1: R22.1 U4.15 | length 355.1
  Top Layer w10: R22.1 3995,4390 4095,4390 4155,4330 4155,4280 U4.15
NetR24_2: R24.2 U3.4 | length 1240.3
  Bottom Layer w10: R24.2 3709.8,4505 4430,4505 4525,4410 4525,4245 4495,4215 U3.4
NetR25_2: R25.2 U2.6 | length 191.9
  Top Layer w10: R25.2 4235,3425.2 U2.6
NetR26_1: R26.1 U2.11 | length 185
  Top Layer w10: R26.1 U2.11
NetR28_1: R28.1 U3.12 | length 425.4
  Bottom Layer w10: U3.12 4245,4165 4270,4140 4270,3914.8 R28.1
NetR29_2: R29.2 U4.4 | length 197.3
  Top Layer w10: R29.2 4210,3925 4260,3975 U4.4
NetR30_1: R30.1 U4.13 | length 224
  Top Layer w10: R30.1 4190,4450 4260,4380 U4.13
NetR32_2: R32.2 U3.6 | length 893.7
  Bottom Layer w10: R32.2 4335,4585 4375,4545 4495,4545 4565,4475 4565,4155 4525,4115 U3.6
NetR33_2: R33.2 U2.8 | length 217.6
  Top Layer w10: R33.2 4135,3380.2 U2.8
NetR34_1: R34.1 U2.9 | length 200.7
  Top Layer w10: R34.1 4085,2975 U2.9
NetR36_1: R36.1 U3.10 | length 399.3
  Bottom Layer w10: R36.1 4109.8,3854.8 4250,3995 4250,4050 4235,4065 U3.10
NetR37_2: R37.2 U4.6 | length 168.6
  Top Layer w10: R37.2 4355,4026.38 U4.6
NetR38_1: R38.1 U4.11 | length 229.1
  Top Layer w10: U4.11 4360,4404.8 R38.1
NetR40_2: R40.2 U3.8 | length 732.9
  Bottom Layer w10: U3.8 4570,4015 4600,4045 4600,4560 R40.2
NetR41_2: R41.2 U4.8 | length 191.4
  Top Layer w10: U4.8 4520,3971.38 R41.2
NetR42_1: R42.1 U4.9 | length 298.9
  Top Layer w10: U4.9 4650,4465 R42.1
PA0: Core1.10 R12.1 | length 145
  Top Layer w10: R12.1 4695,3530
PA1: Core1.11 R17.1 | length 335.8
  Top Layer w10: R17.1 4439.8,3529.8 4490,3580 4695,3580
PA2: Core1.12 R25.1 | length 528.5
  Top Layer w10: R25.1 4315,3630 4695,3630
PA3: Core1.13 R33.1 | length 697.1
  Top Layer w10: R33.1 4180,3650 4620,3650 4650,3680 4695,3680
PA4: Core1.15 R21.1 | length 707.6
  Top Layer w10: R21.1 4145.2,3690 4603.16,3690 4693.16,3780 4695,3780
PA5: Core1.16 R29.1 | length 563.7
  Top Layer w10: R29.1 4280,3710 4573.16,3710 4693.16,3830 4695,3830
PA6: Core1.17 R37.1 | length 427
  Top Layer w10: R37.1 4415,3730 4543.16,3730 4693.16,3880 4695,3880
PA7: Core1.18 R41.1 | length 233
  Top Layer w10: R41.1 4660,3930 4695,3930
PB10: Core1.25 PB10.2 | length 514.2
  Bottom Layer w10: Core1.25 4720,4305 4875,4460 PB10.2
PB11: Core1.24 PB11.2 | length 488.3
  Bottom Layer w10: Core1.24 4775,4230 4940,4065 PB11.2
PB12: Core1.50 U3.15 | length 324.5
  Bottom Layer w10: Core1.50@3855,4280 Core1.50 4025,4280 4060,4315 U3.15
PB13: Core1.49 U3.13 | length 301.2
  Bottom Layer w10: Core1.49 4065,4230 4080,4215 U3.13
PB14: Core1.48 U3.11 | length 321.9
  Bottom Layer w10: Core1.48 3990,4180 4055,4115 U3.11
PB15: Core1.47 U3.9 | length 344.5
  Bottom Layer w10: Core1.47@3858.35,4116.65 Core1.47@3860.18,4116.65 ; Core1.47 3950,4130 4065,4015 U3.9
PC1: Core1.7 PC1.2 | length 1132.1
  Top Layer w10: v1(4835,3015) 4835,2635 5005,2465 PC1.2@5093,2465 ; PC1.2@5103,2455 PC1.2
  Bottom Layer w10: Core1.7 4721.84,3380 4835,3266.84 v1(4835,3015)
PGND: 1.2 5VLED.2 C4.1 C5.2 hub1.2 hub1.4 hub1.6 hub2.2 hub2.4 hub2.6 P3.3 P4.3 P5.3 P6.3 POWER1.2 Q0.S Q1.S Q2.S Q3.S Q4.S Q5.S Q6.S Q7.S QS1.2 R14.1 R19.1 R23.1 R27.1 R31.1 R35.1 R39.1 R43.1 R48.2 step_down1.1 step_down1.6 step_down1.7 | length 3097
  Bottom Layer w10: P6.3 4878.54,4770 5240,4770 5310,4700 5310,2940 5264.29,2894.29 QS1.2
  Bottom Layer w20: R19.1 3145,3690 3435,3980 v1(3435,4010)
  other v1: 3500,1790 4060,1800 3160,1805 1985,1835 4905,1835 4925,1980 1630,2165 2685,3025 2375,3035 2530,3035 2180,3045 2175,3210 2375,3210 2525,3210 2675,3210 2525,3395 2170,3400 2345,3400 2685,3400 2180,3615 2180,3760 2175,4005 2390,4005 2535,4005 2685,4005 3590,4005 2180,4155 2390,4155 2535,4155 2685,4155 1660,4735 5130,4785 4985,4885 1870,4990
RING: Core1.6 RS1.2 | length 563.3
  Top Layer w10: Core1.6@4708.35,3316.65 4721.69,3330 4740,3330 4960,3110 v1(4960,2895)
pads on no net: Core1.3 Core1.8 Core1.9 Core1.14 Core1.19 Core1.20 Core1.21 Core1.22 Core1.23 Core1.26 Core1.27 Core1.28 Core1.29 Core1.30 Core1.31 Core1.32 Core1.33 Core1.34 Core1.35 Core1.36 Core1.37 Core1.40 Core1.41 Core1.42 Core1.43 Core1.44 Core1.45 Core1.46 step_down1.2 step_down1.3 step_down1.4 step_down1.8 step_down1.9 TJA1.5 U1.4

## Polygon pours and split planes (outlines as drawn)
PGND on Top Layer "Top Layer-PGND" (solid, remove dead copper, pour order 8): 1090,1470 1140,1420 5710,1420 5710,5300 5485,5525 1285,5525
GND on Top Layer "Top Layer-GND" (solid, remove dead copper, pour order 0): 3225,4535 3255,4505 3255,4315 3315,4315 3550,4080 3595,4080 3685,3990 3615,3920 3615,3830 3530,3745 3495,3780 3365,3780 3365,3695 3770,3290 3770,3030 4280,2520 4840,2520 4840,2440 5085,2195 5355,2195 5355,4365 5540,4550
PGND on Bottom Layer (solid, remove dead copper, pour order 10): 1410,1475 5660,1475 5770,1365 5770,5460 1250,5460 1215,5495
GND on Bottom Layer "Top Layer-GND" (solid, remove dead copper, pour order 2): 5435,2220 5420,2235 4975,2235 4435,2775 4435,3120 3970,3120 3850,3000 3710,3140 3710,3515 3460,3515 3310,3665 3345,3700 3345,3790 3505,3790 3710,3995 3610,4095 3610,4120 3535,4120 3220,4435 3285,4500 3285,4615 5730,4615 5755,4640

## Keep-outs
Keep-Out Layer:
  lines w10: 1544.37,2000.86 1544.37,1895.48 ccw(c1720,1915) 1710.2,1738.56 5026.98,1738.56 5104.94,1741.5 ccw(c5095.78,1984.66) 5339.11,1984.85 ; 1544.92,4920 1544.92,2005.32 1545.26,2004.98 ; 1545,4885 cw(c1742.5,4892.5) 1735,5090 ; 1730,5090 5105,5090 ; 5095,5090 cw(c5112.5,4862.5) 5340,4880 ; 5340,1984.66 5340,4890

## Silkscreen, mask and mechanical layers (free items; w line width, h text height)
Top Overlay:
  text "PGND B15 24V" at 4845,4710 h30 r180
  text "PGND B14 24V" at 4300,4705 h30 r180
  text "PGND B12 24V" at 3195,4700 h30 r180
  text "PGND B13 24V" at 3740,4700 h30 r180
  text "PGND 24V" at 2575,4590 h40 r180
  text "- + - + - 24v" at 1990,4580 h75 r270
  text "RGND" at 5010,4570 h30 r90
  text "RGND" at 5005,4175 h30 r90
  text "- + - + - 24V" at 1995,3420 h70 r270
  text "CAN_L   H    L    H" at 5045,3025 h30 r90
  text "A7 + 6 + 5 + 4 +" at 2150,2095 h75
  text "A3 + 2 + 1 + 0 +" at 3480,2090 h75
  text "THE PART CONTROL BOARD OF SEMI-AUTOMATIC ROBOT 2018V1.3" at 2610,1780 h30
Bottom Overlay:
  text "A" at 2705,3495 h200
Top Solder:
  lines w10: 1770,3100 1770,3096.46 1776.46,3090 ; 2040,4590 2050,4590
  lines w70: 1638.54,3701.46 1775,3701.46 ; 1645,3245 1775,3245 ; 1654.37,4320.63 1775,4320.63 ; 1657.09,2937.91 1775,2937.91 ; 1661.46,4013.54 1775,4013.54 ; 1775,2630.83 1635,2630.83 1635,4525 2120,5010 2365,5010 ; 1775,3398.54 1918.54,3398.54 ; 1775,3860 1915,3860 ; 1775,4167.09 1907.91,4167.09 ; 1775,4474.17 1910.83,4474.17 ; 1776.46,3090 1915,3090 1925,3100 ; 1779.37,2780 1925,2780 1925,3870 1925,4475 2040,4590 ; 2050,4590 2160,4590 2190,4620 ; 2207.5,4637.5 2255,4685 2500,4685 2500,4825 ; 2350,4835 2350,4995
Bottom Solder:
  lines w10: 1640,2635 1644.17,2630.83 ; 2345,5010 2350,5005 ; 2495,4680 2500,4685
  lines w70: 1637.91,2937.91 1775,2937.91 ; 1640,2635 1640,4535 2115,5010 2345,5010 ; 1640,3245 1775,3245 ; 1640.63,4320.63 1775,4320.63 ; 1644.17,2630.83 1775,2630.83 ; 1646.46,3701.46 1780,3701.46 ; 1650,4015 1785,4015 ; 1775,2784.37 1925,2784.37 1925,4475 1800,4475 ; 1775,3398.54 1928.54,3398.54 ; 1775,3860 1925,3860 ; 1775,4167.09 1927.09,4167.09 ; 1790,3090 1930,3090 ; 1930,4485 2030,4585 2155,4585 2250,4680 2495,4680 ; 2350,4820 2350,5005 ; 2500,4685 2500,4835

## Text inside footprints (layer, text, board x,y; h text height)
Core1: Top Overlay "STM32F103" at 4350,3420 h60 r90; Top Overlay "P1" at 4665,3045 h60 r90; Top Overlay "3V3" at 4825,3055 h60 r90
LS1: Top Overlay "+" at 4985,2675 h59.06
step_down1: Top Overlay "Step_UP_DOWN" at 2520,3225 h60 r90